# Altium PCB IntelligentAccessControlSystem.PcbDoc
Units mil, origin at the board's own origin, x right, y up, seen from the top; angles counter-clockwise.
Board outline 3020 x 3355 mil, 2 copper layers (Top Layer, Bottom Layer); 10 components, 8 nets, 88 pads, 0 vias.
Unrouted connection lines stored in the file: 2.
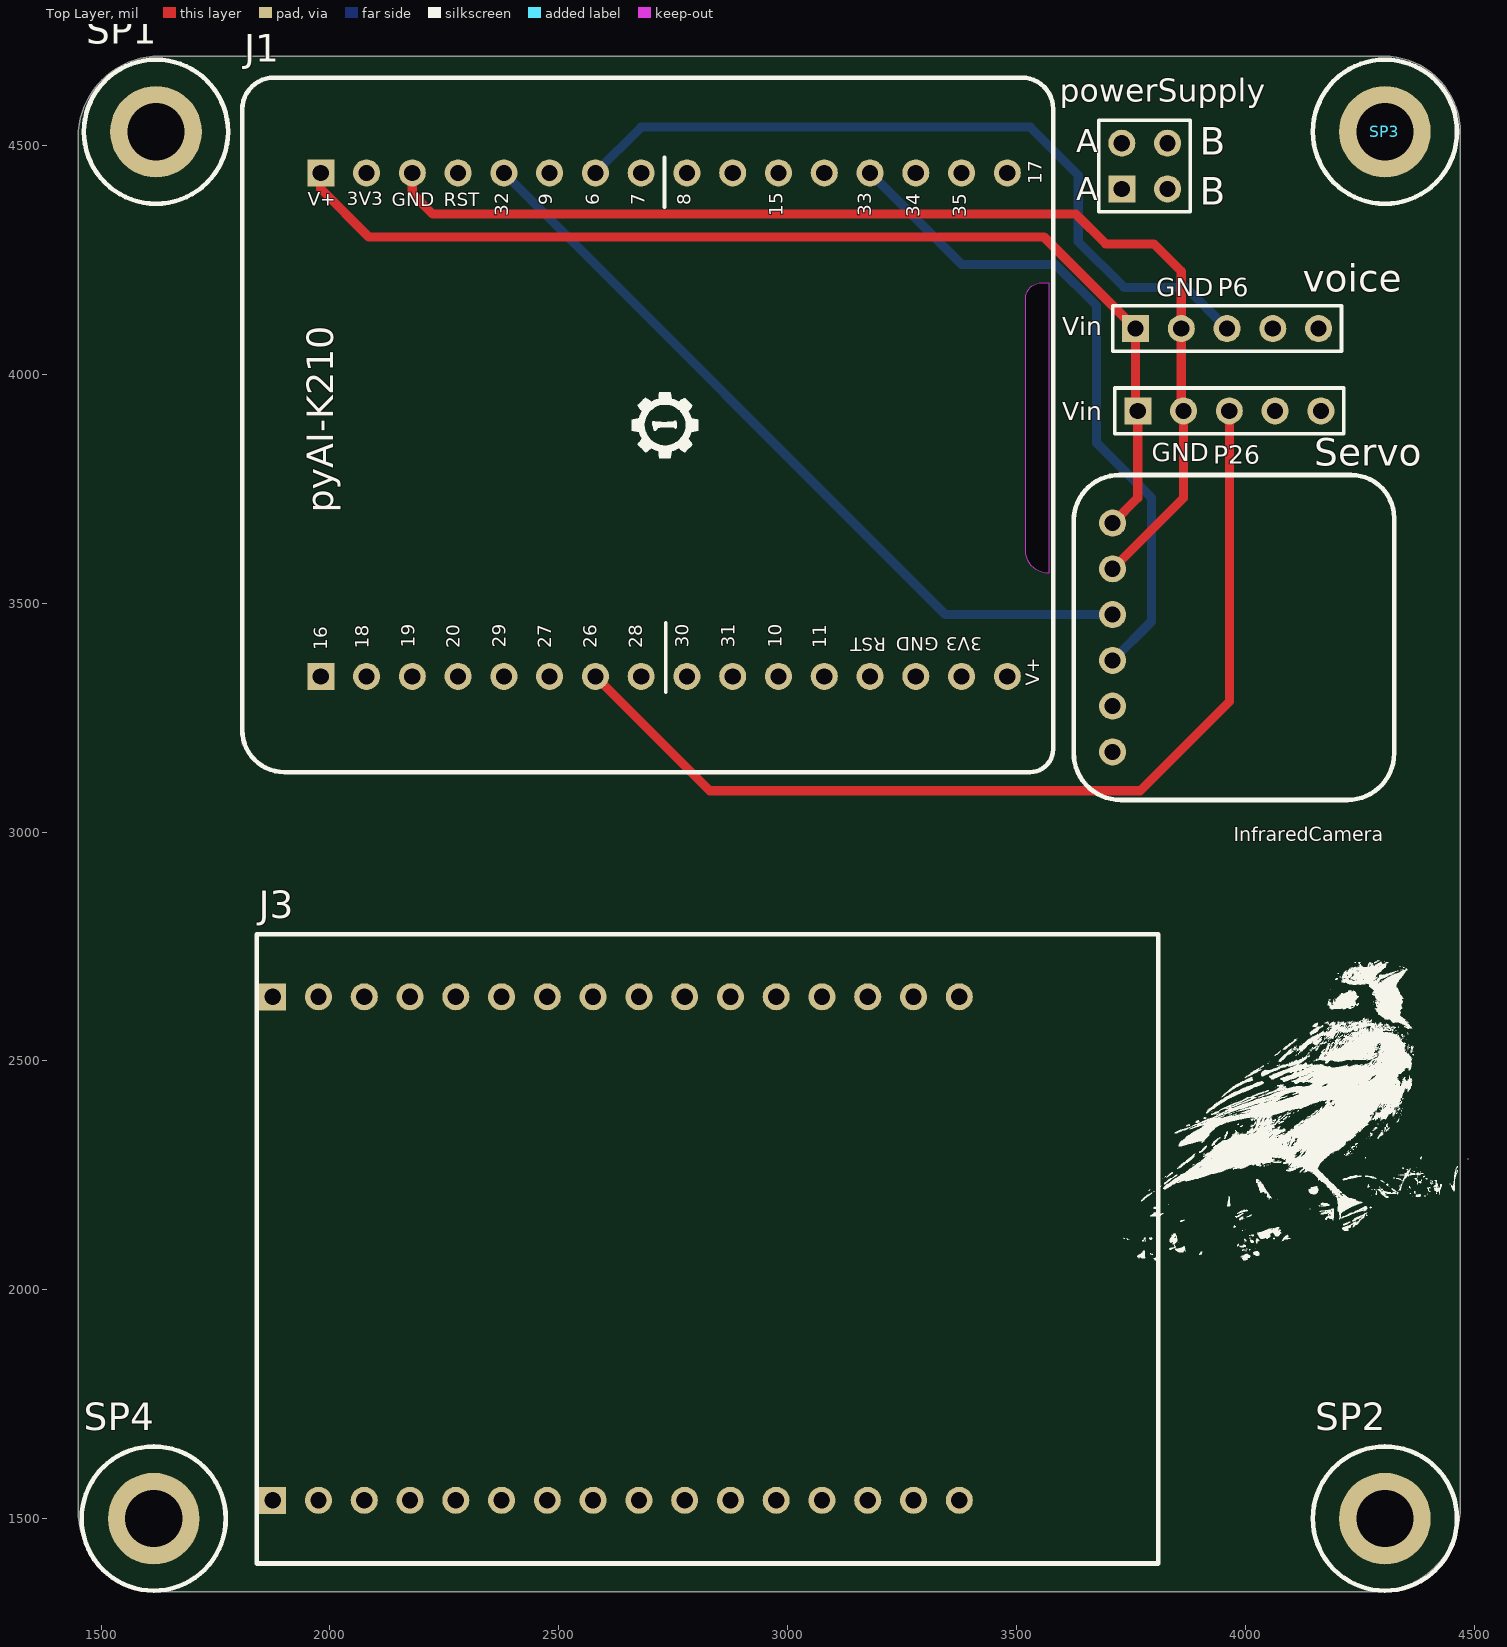
[diagram p0: Top Layer view]
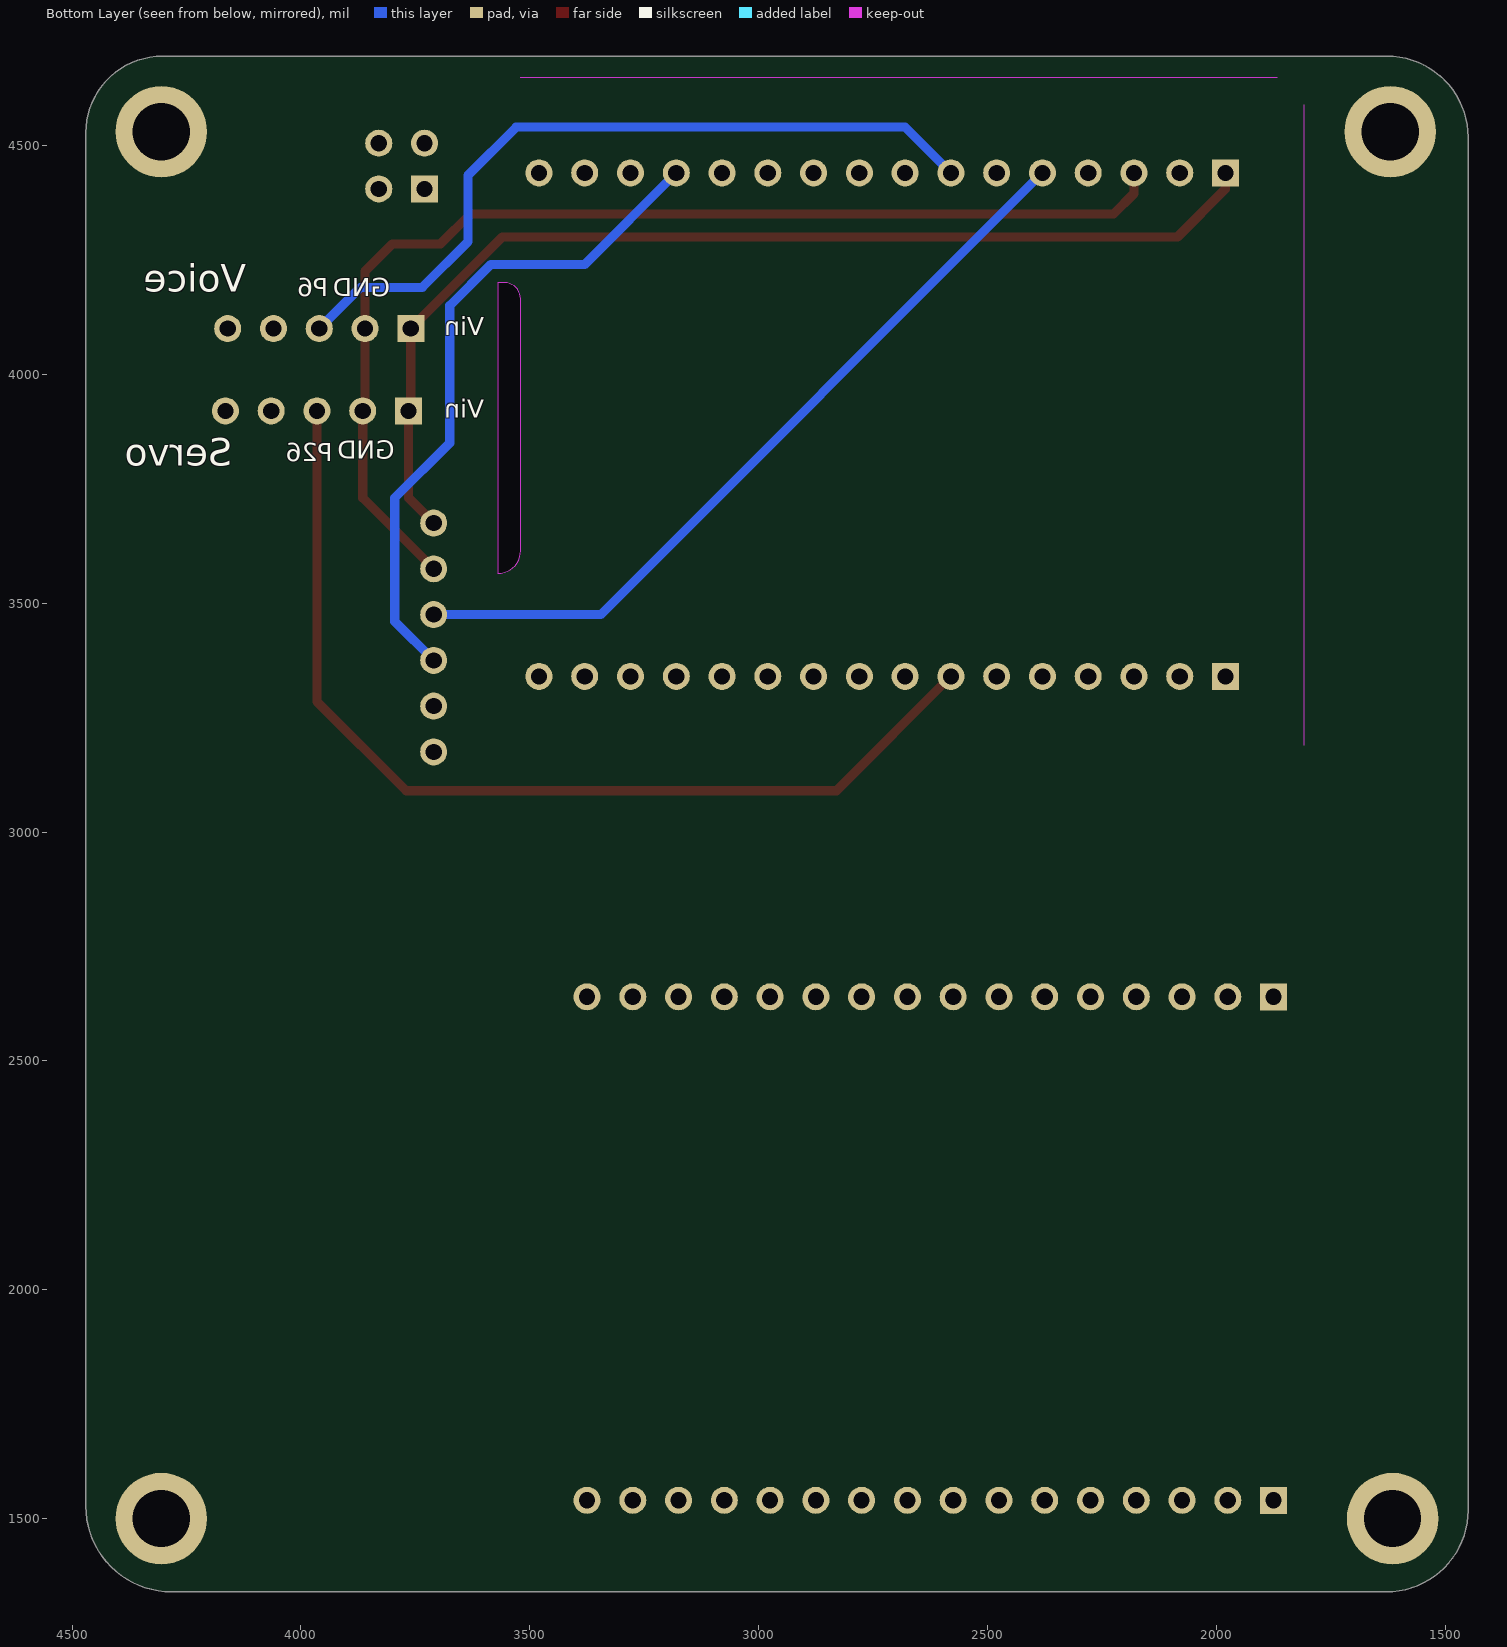
[diagram p1: Bottom Layer view, seen from below]

## Layer stack, top to bottom
Top Solder: solder mask 0.4, Solder Resist, Dk 3.5
Top Layer: signal copper 1.4
Dielectric 1: dielectric 12.6, FR-4, Dk 4.8
Bottom Layer: signal copper 1.4
Bottom Solder: solder mask 0.4, Solder Resist, Dk 3.5

## Board outline
1450,1518.48 1450,4517.89 cw(c1627.11,4517.89) 1627.11,4695 4302.55,4695 cw(c4302.55,4527.55) 4470,4527.55 4470,1527.46 cw(c4282.54,1527.46) 4282.54,1340 1628.48,1340 cw(c1628.48,1518.48)
cut-out: 3570,3565 cw(c3570,3615) 3520,3615 3520,4165 cw(c3555,4165) 3555,4200 3570,4200

## Design rules (kind name [scope] priority, off if disabled: settings)
Clearance [All] p1: gap=10 ignorepadtopadclearanceinfootprint=FALSE except(0: Arc-Hole Track-Hole SMDPad-Hole THPad-Hole Via-Hole Fill-Hole Poly-Hole Region-Hole Text-Hole)
PolygonConnect [All] p1: connectstyle=Relief reliefconductorwidth=10 reliefentries=4 polygonreliefangle="90 Angle" airgapwidth=10
RoutingVias [All] p1: holewidth=28 width=50 viastyle="Through Hole" minholewidth=28 minwidth=50 maxholewidth=28 maxwidth=50
SolderMaskExpansion [All] p1: expansion=4
Width [All] p1: maxlimit=30 minlimit=20 preferedwidth=20 minimp=50.000000 maximp=50.000000 favimp=50.000000
30 further rules are at their usual default settings.

## Components (designator, comment, footprint, x,y, rotation, side; value= is the part's Value field where it differs from the comment)
InfraredCamera "InfraredCamera" InfraredCamera 3620,3795 r270 top (schematic designator J2)
J1 "K210-Main-Board" K210-Main-Board 2730,3890 r90 top
J3 "LCD" LCD 3810,1401.78 r90 top
powerSupply "Additional power supply" HDR2X2 3730,4405 r0 top (schematic designator P2)
Servo "Servo" HDR1X5 3765,3920 r0 top (schematic designator P3)
SP1 "M3铜柱" M3x4_L 1620,4530 r0 top
SP2 "M3铜柱" M3x4_L 4305,1500 r0 top
SP3 "M3铜柱" M3x4_L 4305,4530 r0 top
SP4 "M3铜柱" M3x4_L 1615,1500 r0 top
voice "voice broadcast" HDR1X5 3760,4100 r0 top (schematic designator P1)

## Footprints (in the part's own frame and the unit in brackets; to place one, negate y for a bottom-side part, rotate by r counter-clockwise, add the part's x,y. Pads: shape width x height; smd on the part's side, far side on the other; paste and mask are expansions set on the pad)
HDR1X5 [mm] "Connector; Header; 5 Position"
  rect 1.5x1.5 hole 0.9: 1(0,0)
  round 1.5 hole 0.9: 2(2.54,0) 3(5.08,0) 4(7.62,0) 5(10.16,0)
  silkscreen extent -1.27,-1.27 11.43,1.27
HDR2X2 [mm] "Connector; Header; 2x2 Position"
  rect 1.5x1.5 hole 0.9: 1(0,0)
  round 1.5 hole 0.9: 2(0,2.54) 3(2.54,0) 4(2.54,2.54)
  silkscreen extent -1.27,-1.27 3.81,3.81
InfraredCamera [mm]
  round 1.5 hole 0.9: 1(3.048,2.286) 2(5.588,2.286) 3(8.128,2.286) 4(10.668,2.286) 5(13.208,2.286) 6(15.748,2.286)
  silkscreen extent 0.38,0.13 18.41,17.91
K210-Main-Board [mm]
  rect 1.5x1.5 hole 0.9: 1(-13.97,19.05) 32(13.97,19.05)
  round 1.5 hole 0.9: 2(-13.97,16.51) 3(-13.97,13.97) 4(-13.97,11.43) 5(-13.97,8.89) 6(-13.97,6.35) 7(-13.97,3.81) 8(-13.97,1.27) 9(-13.97,-1.27) 10(-13.97,-3.81) 11(-13.97,-6.35) 12(-13.97,-8.89) 13(-13.97,-11.43) 14(-13.97,-13.97) 15(-13.97,-16.51) 16(-13.97,-19.05) 17(13.97,-19.05) 18(13.97,-16.51) 19(13.97,-13.97) 20(13.97,-11.43) 21(13.97,-8.89) 22(13.97,-6.35) 23(13.97,-3.81) 24(13.97,-1.27) 25(13.97,1.27) 26(13.97,3.81) 27(13.97,6.35) 28(13.97,8.89) 29(13.97,11.43) 30(13.97,13.97) 31(13.97,16.51)
  Keep-Out Layer lines w0: -17.779,23.41 17.761,23.41 ; 19.261,21.91 19.261,-20.09
  silkscreen extent -19.28,-21.59 19.26,23.41
LCD [mm]
  rect 1.5x1.5 hole 0.9: 1(3.511,49.149) 32(31.451,49.149)
  round 1.5 hole 0.9: 2(3.511,46.609) 3(3.511,44.069) 4(3.511,41.529) 5(3.511,38.989) 6(3.511,36.449) 7(3.511,33.909) 8(3.511,31.369) 9(3.511,28.829) 10(3.511,26.289) 11(3.511,23.749) 12(3.511,21.209) 13(3.511,18.669) 14(3.511,16.129) 15(3.511,13.589) 16(3.511,11.049) 17(31.451,11.049) 18(31.451,13.589) 19(31.451,16.129) 20(31.451,18.669) 21(31.451,21.209) 22(31.451,23.749) 23(31.451,26.289) 24(31.451,28.829) 25(31.451,31.369) 26(31.451,33.909) 27(31.451,36.449) 28(31.451,38.989) 29(31.451,41.529) 30(31.451,44.069) 31(31.451,46.609)
  silkscreen extent 0,0 34.92,50.04
M3x4_L [mil] "M3铜柱，长：4mm"
  round 200 hole 125: 1(0,0)
  silkscreen extent -157,-157 157,157, body extent -106,-93 106,93, height 159

## Part data
powerSupply: library part "Header 2X2", "Header, 2-Pin, Dual row", LatestRevisionDate=17-Jul-2002, LatestRevisionNote="Re-released for DXP Platform.", Publisher="Altium Limited"
Servo voice: library part "Header 5", "Header, 5-Pin", LatestRevisionDate=17-Jul-2002, LatestRevisionNote="Re-released for DXP Platform.", Publisher="Altium Limited"
SP1 SP2 SP3 SP4: library part 铜柱小焊盘, "铜柱"

## Nets (pads, with @x,y where several pads share a name; then routed paths per layer and width w, separated by ;. In a path a pad name is that pad's centre, name@x,y a point inside that pad or via, vN(x,y) a via of type N, cw(c..) or ccw(c..) an arc to the next point about the centre after c; other vN are vias at no path point)
6: J1.26 voice.3 | length 1688.6
  Bottom Layer w20: J1.26 2680,4540 3530,4540 3635,4435 3635,4290 3735,4190 3870,4190 voice.3
26: J1.7 Servo.3 | length 2204.3
  Top Layer w20: J1.7 2830,3090 3770,3090 3965,3285 Servo.3
GND: InfraredCamera.2 J1.30 Servo.2 voice.2 | length 2511.7
  Top Layer w20: J1.30 2180,4395 2225,4350 3630,4350 3695,4285 3800,4285 3860,4225 voice.2 3860,3925 Servo.2 3865,3730 InfraredCamera.2
NetP2_1: powerSupply.1 powerSupply.2
NetP2_3: powerSupply.3 powerSupply.4
SCL: InfraredCamera.3 J1.28 | length 1729.7
  Bottom Layer w20: J1.28 3345,3475 InfraredCamera.3
SDA: InfraredCamera.4 J1.20 | length 1475
  Bottom Layer w20: J1.20 3380,4240 3585,4240 3675,4150 3675,3850 3795,3730 3795,3460 InfraredCamera.4
Vin: InfraredCamera.1 J1.32 Servo.1 voice.1 | length 2391.2
  Top Layer w20: J1.32 1980,4405 2085,4300 3560,4300 voice.1 3760,3925 Servo.1 3765,3730 InfraredCamera.1
pads on no net: InfraredCamera.5 InfraredCamera.6 J1.1 J1.2 J1.3 J1.4 J1.5 J1.6 J1.8 J1.9 J1.10 J1.11 J1.12 J1.13 J1.14 J1.15 J1.16 J1.17 J1.18 J1.19 J1.21 J1.22 J1.23 J1.24 J1.25 J1.27 J1.29 J1.31 J3.1 J3.2 J3.3 J3.4 J3.5 J3.6 J3.7 J3.8 J3.9 J3.10 J3.11 J3.12 J3.13 J3.14 J3.15 J3.16 J3.17 J3.18 J3.19 J3.20 J3.21 J3.22 J3.23 J3.24 J3.25 J3.26 J3.27 J3.28 J3.29 J3.30 J3.31 J3.32 Servo.4 Servo.5 SP1.1 SP2.1 SP3.1 SP4.1 voice.4 voice.5

## Silkscreen, mask and mechanical layers (free items; w line width, h text height)
Top Overlay:
  drawing of 5566 lines, arcs and shapes, not listed
  text "B" at 3900,4480 h60
  text "GND" at 3805,4170 h40
  text "P6" at 3940,4170 h40
  text "Vin" at 3600,4085 h40
  text "Vin" at 3600,3900 h40
  text "GND" at 3795,3810 h40
  text "P26" at 3930,3805 h40
Bottom Overlay:
  text "Voice" at 4120,4180 h60
  text "GND" at 3805,4170 h40
  text "P6" at 3940,4170 h40
  text "Vin" at 3600,4085 h40
  text "Vin" at 3600,3905 h40
  text "GND" at 3795,3815 h40
  text "P26" at 3930,3810 h40
  text "Servo" at 4150,3800 h60
Mechanical 1:
  lines w10: 1450,1518.48 ccw(c1628.48,1518.48) 1628.48,1340 4175,1340 4282.54,1340 ccw(c4282.54,1527.46) 4470,1527.46 4470,4400 4470,4527.55 ccw(c4302.55,4527.55) 4302.55,4695 1910,4695 1627.11,4695 ccw(c1627.11,4517.89) 1450,4517.89 1450,3700 1450,1518.48 ; 3520,3615 ccw(c3570,3615) 3570,3565 3570,4200 3555,4200 ccw(c3555,4165) 3520,4165 3520,3615 ; 3740,1750 ccw(c3790,1750) 3790,1700 3790,2335 3775,2335 ccw(c3775,2300) 3740,2300 3740,1750

## Text inside footprints (layer, text, board x,y; h text height)
J1: Top Overlay "V+" at 3559.66,3320.06 h50 r90; Top Overlay "pyAI-K210" at 2027,3697 h100 r90; Top Overlay "17" at 3564.66,4415.06 h50 r90; Top Overlay "35" at 3399.66,4343.41 h50 r90; Top Overlay "34" at 3298.66,4343.06 h50 r90; Top Overlay "33" at 3192.66,4344.94 h50 r90; Top Overlay "15" at 2998.66,4345.31 h50 r90; Top Overlay "8" at 2798.66,4369.07 h50 r90; Top Overlay "7" at 2697.66,4369.17 h50 r90; Top Overlay "6" at 2598.66,4369.78 h50 r90; Top Overlay "9" at 2495.66,4369.78 h50 r90; Top Overlay "32" at 2399.66,4345.28 h50 r90; Top Overlay "RST" at 2249.06,4357.56 h50; Top Overlay "GND" at 2135.06,4357.56 h50; Top Overlay "3V3" at 2037.06,4359 h50; Top Overlay "V+" at 1952.06,4358.09 h50; Top Overlay "3V3" at 3424.94,3435.22 h50 r180; Top Overlay "GND" at 3329.94,3435.66 h50 r180; Top Overlay "RST" at 3214.94,3434.66 h50 r180; Top Overlay "11" at 3093.66,3401.06 h50 r90; Top Overlay "10" at 2996.66,3402.06 h50 r90; Top Overlay "31" at 2894.66,3402.06 h50 r90; Top Overlay "30" at 2793.66,3402.06 h50 r90; Top Overlay "28" at 2692.66,3401.06 h50 r90; Top Overlay "26" at 2592.66,3401.06 h50 r90; Top Overlay "27" at 2493.52,3401.32 h50 r90; Top Overlay "29" at 2394.22,3402.06 h50 r90; Top Overlay "20" at 2293.52,3401.09 h50 r90; Top Overlay "19" at 2195.22,3402.06 h50 r90; Top Overlay "18" at 2094.66,3400.06 h50 r90; Top Overlay "16" at 2004.31,3397.06 h50 r90
powerSupply: Top Overlay "B" at 3900,4370 h60; Top Overlay "A" at 3630,4485 h50; Top Overlay "A" at 3630,4380 h50